# Altium PCB senoko_pvt1.PcbDoc (part 2 of 3)
Units mil, origin at the board's own origin, x right, y up, seen from the top; angles counter-clockwise.
Board outline 4901.58 x 1614.17 mil, 4 copper layers (Top Layer, Internal Plane 1, Internal Plane 2, Bottom Layer), stack 65.8 mil thick; 226 components, 139 nets, 941 pads, 366 vias.
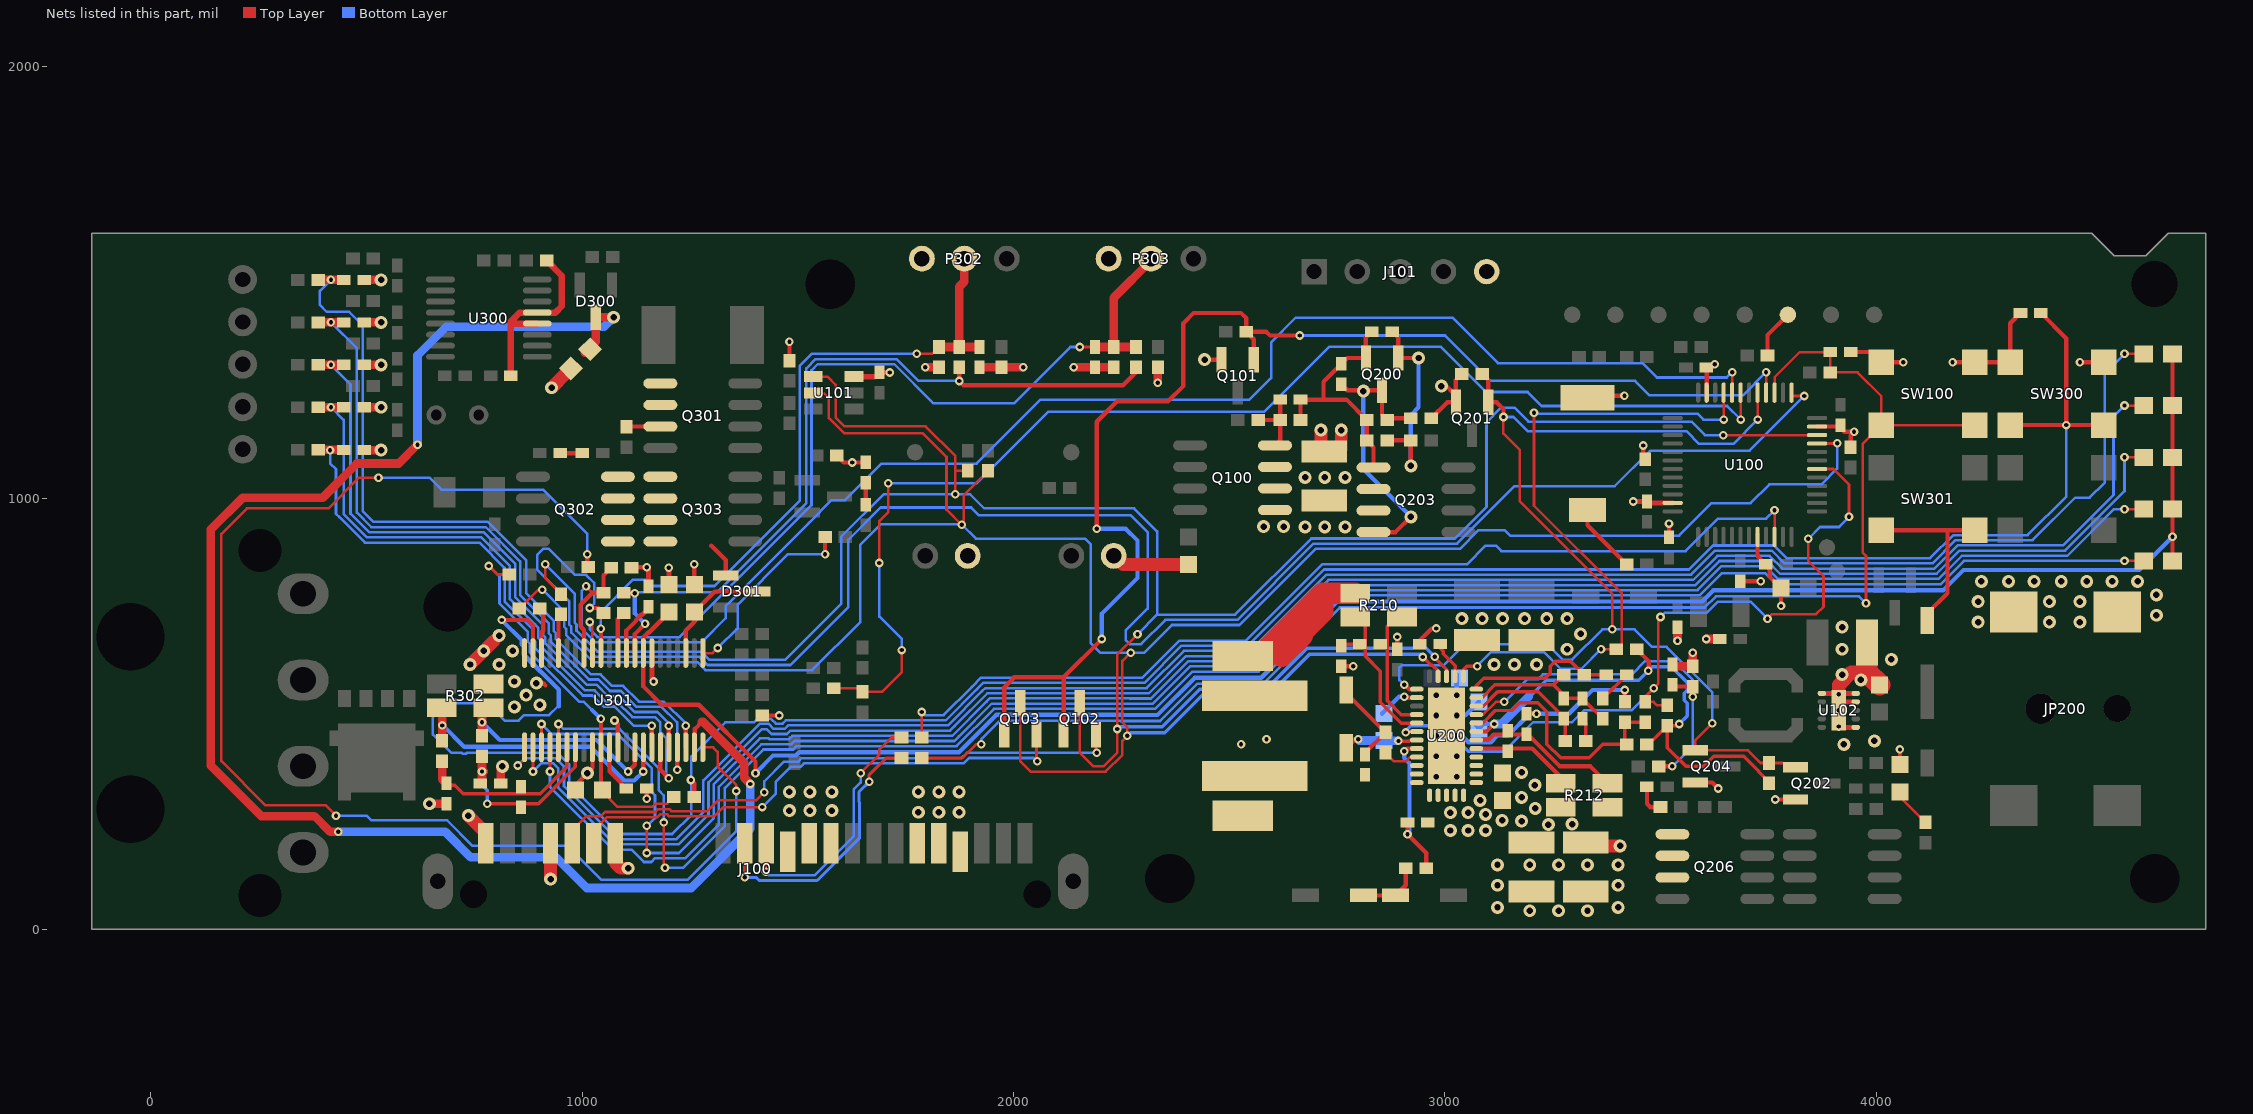
[diagram p4: the nets of this part, all layers, seen from the top]

## Via types
v1: diameter 20, hole 10, Top Layer to Bottom Layer, tented both sides, 200 vias
v2: diameter 30, hole 15, Top Layer to Bottom Layer, tented both sides, 156 vias
v3: diameter 25.98, hole 12.99, Top Layer to Bottom Layer, tented both sides, 10 vias

## Nets (pads, with @x,y where several pads share a name; then routed paths per layer and width w, separated by ;. In a path a pad name is that pad's centre, name@x,y a point inside that pad or via, vN(x,y) a via of type N, cw(c..) or ccw(c..) an arc to the next point about the centre after c; other vN are vias at no path point) (continued)
CHG_ACIN: C217.1 R214.2 R215.1 U200.9 | length 889.5
  Top Layer w6: U200.9@3072.83,498.03 3088.58,498.03 3118.11,527.56 v1(3137.8,527.56)
  Top Layer w10: R214.2@3496.06,377.95 v1(3527.56,377.95) ; C217.1@3531.5,562.99 R215.1@3574.8,562.99 v1(3574.8,539.37)
  Bottom Layer w6: v1(3137.8,527.56) 3189.96,579.72 3215.55,579.72 3227.36,591.54 3434.06,591.54 3464.57,622.05 3530.51,622.05 3574.8,577.76 v1(3574.8,539.37) 3574.8,425.2 v1(3527.56,377.95)
CHG_ACOK: Q201.1 Q202.1 Q204.1 R203.2 R222.2 U100.29 U200.18 | length 2750.5
  Top Layer w6: v1(3135.83,1187.99) 3135.83,1149.61 3173.23,1112.2 3173.23,993.11 3387.8,778.54 v1(3387.8,695.87) ; v1(3620.08,478.35) 3580.71,438.98 Q204.1@3580.71,415.35 3702.76,415.35 3732.28,385.83 3783.46,385.83 3793.31,375.98 Q202.1@3812.99,375.98 ; v1@3725.06,1182.42 U100.29@3725.06,1236.76
  Top Layer w10: v1(2905.51,566.93) 2907.64,566.93 2917.49,557.09 U200.18@2935.04,557.09 ; R203.2@3086.61,1287.4 3100.39,1273.62 Q201.1@3100.39,1222.44 3120.08,1222.44 3135.83,1206.69 v1(3135.83,1187.99)
  Bottom Layer w6: v1(2905.51,566.93) 2894.69,577.76 2894.69,607.28 2899.61,612.2 2997.05,612.2 3046.26,661.42 3237.2,661.42 3273.02,625.61 3294.9,625.61 3365.16,695.87 v1(3387.8,695.87) 3439.67,695.87 3480.32,655.22 3514.31,655.22 3620.08,549.45 v1(3620.08,478.35) ; v1(3135.83,1187.99) 3159.06,1187.99 3192.52,1154.53 3561.02,1154.53 3589.57,1125.98 3669.29,1125.98 v1(3725.39,1182.09)
CHG_ALERT: R326.2 U100.25 | length 4233.4
  Top Layer w6: U100.25@3803.8,1236.76 v1(3833.13,1236.76) v1@3833.66,1236.22
  Top Layer w10: v1(1017.72,745.08) 1037.4,745.08 R326.2@1049.21,733.27
  Bottom Layer w6: v1(1017.72,745.08) 1027.86,755.22 1027.86,803.15 1009.15,821.85 983.27,821.85 922.24,882.87 910.43,882.87 895.37,867.81 895.37,834.94 970.28,760.03 970.28,706.3 974.58,702 974.58,687.79 1030.49,631.89 1271.65,631.89 1290.4,613.14 1482.34,613.14 1617.13,747.92 1617.13,903.43 1691.85,978.16 1901.57,978.16 1919.1,960.63 2271.65,960.63 2311.02,921.26 2311.02,744.09 2259.84,692.91 2259.84,671.26 2269.69,661.42 2295.96,661.42 2352.26,717.71 2518.68,717.71 2695.39,894.42 3028.28,894.42 3161.61,1027.75 3393.89,1027.75 3476.38,1110.24 3706.61,1110.24 v1(3833.13,1236.76)
CHG_BD: C206.1 D202.2 R211.2 | length 206.7
  Top Layer w10: D202.2@2771.65,555.12 2771.65,547.24 R211.2@2862.2,456.69 2814.96,409.45 C206.1@2814.96,405.51
CHG_BOOT: R211.1 U200.26 | length 85.1
  Top Layer w6: R211.1@2862.2,409.45 2881.89,389.76 2909.45,389.76 2919.29,399.61 U200.26@2935.04,399.61
CHG_CE: R220.2 U100.33 U200.13 | length 1556.9
  Top Layer w6: v1(3206.69,1197.83) 3206.69,982.28 3410.43,778.54 3410.43,662.4 R220.2@3397.64,649.61 v1(3362.2,649.61) ; U100.33@3646.32,1236.76 3646.32,1182.42 v1(3646.65,1182.09)
  Top Layer w8: U200.13@3043.31,586.61 3043.31,602.36 3051.18,610.24 v1(3074.8,610.24)
  Bottom Layer w6: v1(3074.8,610.24) 3107.28,642.72 3229.33,642.72 3267.72,604.33 3316.93,604.33 v1(3362.2,649.61) ; v1@3209.65,1195.87 3585.63,1195.87 3599.41,1182.09 v1(3646.65,1182.09)
CHG_CSON: C212.1 R210.4 U200.21 | length 297.9
  Top Layer w8: R210.4@2900.59,724.41 2887.8,724.41 2866.14,702.76 2866.14,530.65 2898.76,498.03 U200.21@2935.04,498.03
CHG_CSOP: C212.2 C218.2 R210.1 U200.22 | length 371.4
  Top Layer w8: C218.2@2759.84,657.48 2763.78,661.42 C212.2@2803.15,661.42 ; R210.1@2792.32,724.41 2814.96,701.77 2814.96,633.86 2850.39,598.43 2850.39,526.6 2898.65,478.35 U200.22@2935.04,478.35
CHG_CSSN: C216.2 R212.4 U200.5 | length 237.9
  Top Layer w10: U200.5@3072.83,419.29 3202.76,419.29 3268.7,353.35 R212.4@3268.7,338.58
CHG_CSSP: C216.1 C219.1 R212.1 U200.6 | length 356.5
  Top Layer w10: U200.6@3072.83,438.98 3100.39,438.98 3113.36,451.95 3192.73,451.95 3266.72,377.95 3337.6,377.95 R212.1@3376.97,338.58
CHG_DCINA: C203.1 R207.2 U200.25 | length 356.3
  Top Layer w10: v1(2905.51,413.39) 2911.42,419.29 U200.25@2935.04,419.29 ; C203.1@2913.39,248.03 v1(2913.39,220.47) 2956.69,177.17 R207.2@2956.69,141.73
  Bottom Layer w10: v1(2905.51,413.39) 2905.51,397.64 2918.13,385.02 2918.13,225.22 v1(2913.39,220.47)
CHG_EAI: C220.2 C221.2 R223.1 R224.1 U200.11 | length 379.4
  Top Layer w8: U200.11@3072.83,537.4 3086.61,537.4 3116.14,566.93 3251.97,566.93 ; C221.2@3275.59,535.43 C221.2@3283.46,535.43 ; R223.1@3275.59,590.55 3251.97,566.93 ; R224.1@3366.14,488.19 C220.2@3318.9,535.43 C221.2@3283.46,535.43 ; 3251.97,566.93 C221.2@3283.46,535.43
CHG_EAO: C221.1 R219.2 U200.10 | length 297.8
  Top Layer w8: U200.10@3072.83,517.72 3088.58,517.72 3122.05,551.18 3216.54,551.18 3279.53,488.19 R219.2@3279.53,437.01
CHG_FBO: C225.2 R223.2 U200.12 | length 355
  Top Layer w8: U200.12@3072.83,557.09 3072.83,564.96 3090.55,582.68 3232.28,582.68 3244.09,594.49 3244.09,610.24 3255.91,622.05 3291.34,622.05 R223.2@3322.83,590.55 C225.2@3374.02,590.55
CHG_ICOUT: R216.2 R218.2 U100.18 U200.23 | length 1839.8
  Top Layer w6: v1(2909.45,456.69) 2911.42,458.66 U200.23@2935.04,458.66 ; v1(3500,724.41) 3494.94,719.35 3494.94,569.75 v1(3484.24,559.05) 3464.57,539.38 R218.2@3464.57,527.56 3484.25,527.56 3492.13,519.69 R216.2@3515.75,519.69 ; v1(3748.03,720.47) 3758.56,731 3860.92,731 3877.95,748.03 3877.95,818.9 3842.52,854.33 v1(3842.52,905.51) ; U100.18@3862.85,1067.47 3901.04,1067.47 3937.01,1031.5 v1(3937.01,956.69)
  Bottom Layer w6: 3137.8,413.39 3204.72,480.32 3295.28,480.32 3322.72,507.76 3432.95,507.76 v1(3484.24,559.05) ; v1(3500,724.41) 3510.01,734.42 3607.41,734.42 3633.08,760.09 3708.42,760.09 v1(3748.03,720.47) ; v1(3842.52,905.51) 3870.08,933.07 3914.37,933.07 v1@3935.04,953.74
  Bottom Layer w8: v1(2909.45,456.69) 2909.45,460.63 2920.63,471.81 2989.84,471.81 3003.31,458.34 3003.31,440.55 3018.04,425.83 3041.34,425.83 3053.78,413.39 3137.8,413.39
CHG_ICREF: R217.2 R218.1 R221.1 U200.8 | length 578.2
  Top Layer w8: U200.8@3072.83,478.35 3087.86,478.35 3117.07,507.56 3154.83,507.56 3173.02,525.75 3215.13,525.75 3236.22,504.65 3236.22,429.67 3268.25,397.64 3334.65,397.64 3366.14,429.13 R217.2@3421.26,429.13 3417.32,433.07 R221.1@3417.32,480.32 R218.1@3464.57,480.32
CHG_IRQ: R115.1 U100.10 | length 2300.2
  Top Layer w6: R115.1@1787.4,444.88 v1(1787.4,503.94) ; U100.10@3764.43,917.86 v1(3764.43,971.79)
  Bottom Layer w6: v1(1787.4,503.94) 1794.4,496.94 1838,496.94 1903.25,562.2 1924.63,583.57 2298.61,583.57 2384.75,669.71 2538.56,669.71 2715.27,846.42 3051.14,846.42 3094.49,889.76 3118.11,889.76 3130.87,877.01 3557.84,877.01 3633.02,952.19 3744.83,952.19 v1(3764.43,971.79)
CHG_IRQ_CN: J100.13 R115.2 | length 600.3
  Top Layer w6: v1(1425.2,133.86) 1425.2,198.43 J100.13@1426.57,199.8 ; v1(1645.67,362.2) 1688.98,405.51 1688.98,417.32 1716.54,444.88 R115.2@1740.16,444.88
  Bottom Layer w6: v1(1425.2,133.86) 1433.07,125.98 1539.37,125.98 1629.92,216.54 1629.92,289.39 1629.42,289.89 1629.42,324.26 1645.67,340.51 v1(1645.67,362.2)
CHG_MASTERPWR: Q101.1 Q102.1 Q103.1 R108.2 U100.28 | length 3122.4
  Top Layer w6: U100.28@3744.75,1236.76 v1(3744.75,1291.99)
  Top Layer w10: Q103.1@1978.35,450.79 1978.35,561.02 2001.97,584.65 2116.14,584.65 ; Q102.1@2116.14,450.79 2116.14,584.65 ; v1(2192.91,929.13) 2192.91,1177.17 2240.16,1224.41 2358.27,1224.41 2393.7,1259.84 2393.7,1405.51 2417.32,1429.13 2527.56,1429.13 2539.37,1417.32 R108.2@2539.37,1385.83 ; v1(2204.72,673.23) 2116.14,584.65 ; Q101.1@2557.09,1320.87 2557.09,1368.11 R108.2@2539.37,1385.83 ; v1(2663.39,1376.97) 2594.49,1376.97 2585.63,1385.83 R108.2@2539.37,1385.83
  Bottom Layer w6: v1(2663.39,1376.97) 3000.87,1376.97 3106.19,1271.65 3440.83,1271.65 3474.3,1238.19 3690.95,1238.19 v1(3744.75,1291.99)
  Bottom Layer w10: v1(2192.91,929.13) 2259.84,929.13 2287.4,901.57 2287.4,814.96 2204.72,732.28 v1(2204.72,673.23)
CHG_PWRSWITCH: C116.2 R119.1 R120.1 SW100.1 SW100.2 U100.27 | length 3461.1
  Top Layer w6: R120.1@1787.4,397.64 1881.89,397.64 1913.39,429.13 v1(1925.2,429.13) ; U100.27@3764.43,1236.76 3764.43,1280.18 3822.83,1338.58 C116.2@3893.7,1338.58 R119.1@3893.7,1291.34 3956.69,1291.34 4011.81,1236.22 SW100.1@4011.81,1169.29 ; v1(3976.38,755.91) 3976.38,866.14 3968.5,874.02 3968.5,1125.98 SW100.1@4011.81,1169.29 ; SW100.2@4228.35,1169.29 SW100.1@4011.81,1169.29
  Bottom Layer w6: v1(1925.2,429.13) 1925.2,440.94 1967.82,483.57 2248.03,483.57 2248.31,483.28 2339.75,483.28 2426.17,569.71 2579.99,569.71 2756.69,746.42 3602.44,746.42 3628.11,772.09 3960.2,772.09 v1(3976.38,755.91)
CHG_PWRSWITCH_CN: J100.14 R120.2 | length 636.4
  Top Layer w7: v1(1376.57,120.67) J100.14@1376.57,199.8 ; v1(1665.35,342.52) 1665.35,358.27 1704.72,397.64 R120.2@1740.16,397.64
  Bottom Layer w7: v1(1376.57,120.67) 1402.95,120.67 1410.14,113.48 1544.55,113.48 1642.42,211.36 1642.42,294.57 1641.92,295.07 1641.92,319.08 v1(1665.35,342.52)
CHG_SCL: Q103.3 R225.2 R329.2 U100.21 U101.5 U200.16 | length 6189.7
  Top Layer w6: R329.2@854.33,744.09 897.64,787.4 v1(907.48,787.4) ; U101.5@1535.43,1244.09 1533.46,1244.09 1532.48,1243.11 1560.04,1243.11 1571.85,1231.3 1571.85,1185.79 1607.05,1150.59 1789.37,1150.59 1844.49,1095.47 1844.49,973.43 v1(1879.92,937.99) 1884.16,942.23 1884.16,1006.2 R225.2@1940.94,1062.99 ; Q103.3@2015.75,525.59 2015.75,389.76 2039.56,365.95 2213.63,365.95 2252.16,404.48 2252.16,437.2 v1(2263.78,448.82) 2263.78,468.51 2252.16,480.13 2252.16,622.24 v1(2271.65,641.73) ; U100.21@3854.98,1126.52 v1@3909.32,1126.52
  Top Layer w8: v1(2948.82,631.64) 2968.09,612.36 2971.16,612.36 2984.25,599.27 U200.16@2984.25,586.61
  Bottom Layer w6: v1(907.48,787.4) 907.48,788.39 958.28,737.58 958.28,701.33 962.58,697.03 962.58,682.82 1025.52,619.89 1266.68,619.89 1285.43,601.14 1533.12,601.14 1644.89,712.91 1644.89,891.93 1691.93,938.98 1879.92,938.98 1912.74,906.16 2165.63,906.16 2179.13,892.65 2179.13,663.39 2200.79,641.73 v1(2271.65,641.73) 2303.15,641.73 2367.13,705.71 2523.65,705.71 2700.36,882.42 3034.74,882.42 3078.08,925.76 3138.45,925.76 3151.21,913.01 3542.93,913.01 3618.11,988.19 3708.66,988.19 3752.46,1031.99 3873.52,1031.99 3909.65,1068.12 v1(3909.65,1126.85)
  Bottom Layer w8: v1(2263.78,448.82) 2271.24,456.28 2350.93,456.28 2437.36,542.71 2591.17,542.71 2686.1,637.64 2942.82,637.64 v1(2948.82,631.64)
CHG_SDA: Q102.3 R226.2 R327.2 U100.22 U101.4 U200.15 | length 6017.2
  Top Layer w6: v1(914.37,846.46) 914.37,813.98 R327.2@950.79,777.56 ; U101.4@1535.43,1281.5 1568.9,1281.5 1587.6,1262.8 1587.6,1187.01 1608.27,1166.34 1796.26,1166.34 1865.16,1097.44 1865.16,1062.99 ; v1(1865.16,1008.86) 1865.16,1062.99 ; R226.2@1893.7,1062.99 1865.16,1062.99 ; Q102.3@2153.54,525.59 2153.54,409.45 2185.04,377.95 2208.66,377.95 2240.16,409.45 v1(2240.16,464.57) 2240.16,637.11 2287.11,684.06 v1(2287.4,684.06) ; v1(3645.67,1145.67) 3646.2,1146.2 3799.75,1146.2 U100.22@3854.98,1146.2
  Top Layer w8: v1(2976.38,632.36) 2976.38,629.92 3003.94,602.36 U200.15@3003.94,586.61
  Bottom Layer w6: v1(914.37,846.46) 982.28,778.54 982.28,711.27 986.58,706.97 986.58,692.76 1035.46,643.89 1276.62,643.89 1295.37,625.14 1470.61,625.14 1600.34,754.87 1600.34,910.38 1698.82,1008.86 v1(1865.16,1008.86) 1899.61,1008.86 1932.09,976.38 2279.53,976.38 2333.06,922.85 2333.06,729.71 ; v1(2287.4,684.06) 2333.06,729.71 ; v1(3645.67,1145.67) 3645.13,1146.2 3602.81,1146.2 3571.85,1177.17 3193.9,1177.17 3161.42,1209.65 3130.61,1209.65 3096.46,1175.49 3096.46,979.57 3023.31,906.42 2690.42,906.42 2513.71,729.71 2333.06,729.71
  Bottom Layer w8: v1(2240.16,464.57) 2245.87,470.28 2345.13,470.28 2431.56,556.71 2585.37,556.71 2680.3,651.64 2957.1,651.64 v1(2976.38,632.36)
CHG_SW: C206.2 L200.1 L200B.1 U200.27 U200.28 U200.29 U200.30 U200.31
CHG_SYS: C100.1 C200.2 C201.1 C202.1 C209.1 C210.1 C211.1 Q100.1 Q100.2 Q100.3 Q200.2 Q203.1 Q203.2 Q203.3 R104.2 R200.1 R204.1 R212.3 U200.2 U200.3 U200.4 | length 649.2
  Top Layer w10: R104.2@2665.35,1181.1 C100.1@2665.35,1228.35 2718.5,1228.35 ; C200.2@2830.71,1385.83 2816.93,1372.05 Q200.2@2816.93,1324.8 2773.62,1324.8 C202.1@2759.84,1311.02 2718.5,1269.69 2718.5,1228.35 ; Q203.1@2834.65,1071.06 2834.65,1118.11 R200.1@2818.9,1133.86 R204.1@2818.9,1181.1 2771.65,1228.35 2718.5,1228.35
  Top Layer w30: C210.1@3326.77,201.77 3334.65,193.9 v2(3406.5,193.9)
  other v2: 3240.16,243.11 3295.28,244.09 3178.15,250.98 3209.65,280.51 3178.15,306.1 3208.66,334.65 3178.15,364.17 2676.18,933.07 2721.46,933.07 2768.7,933.07 2579.72,934.06 2625.98,934.06 2676.18,1048.23 2721.46,1048.23 2768.7,1048.23
CHG_SYS_GATE: C100.2 Q100.4 R104.1 R105.2 | length 162.2
  Top Layer w10: R105.2@2566.93,1181.1 R104.1@2618.11,1181.1 ; Q100.4@2606.3,1122.24 2618.11,1134.06 R104.1@2618.11,1181.1 ; C100.2@2618.11,1228.35 R104.1@2618.11,1181.1
CHG_VDDP: C215.1 D202.1 U200.24 | length 174.1
  Top Layer w8: v1@2892.36,436.69 2917.73,436.69 2920.02,438.98 U200.24@2935.04,438.98
  Top Layer w10: D202.1@2771.65,421.26 2791.34,440.94 v1(2799.21,440.94)
  Bottom Layer w20: v1(2799.21,440.94) 2802.17,437.99 C215.1@2859.25,437.99 2860.24,437.01 v1(2892.36,437.01)
CHG_VICM: C224.1 U200.14 | length 92.7
  Top Layer w8: C224.1@2980.31,661.42 2996.38,645.35 2996.38,638.76 3023.62,611.51 U200.14@3023.62,586.61
CHG_VREF: C214.1 R216.1 R217.1 R220.1 R222.1 U200.7 | length 1218.1
  Top Layer w8: R217.1@3468.5,429.13 3472.44,429.13 R216.1@3515.75,472.44 ; v1(3543.31,476.38) 3539.37,472.44 R216.1@3515.75,472.44 ; R222.1@3755.54,338.58 3728.19,365.94 3728.19,366.3 3692.91,401.57 3623.65,401.57 3600.03,377.95 3559.06,377.95 3515.75,421.26 R216.1@3515.75,472.44
  Top Layer w10: U200.7@3072.83,458.66 3096.46,458.66 v1(3114.17,476.38) ; R220.1@3444.88,649.61 3472.44,622.05 v1@3472.44,599.41
  Bottom Layer w8: C214.1@3071.5,471.81 C214.1@3078.74,464.57 ; 3201.4,543.86 3235.29,577.76 3449.8,577.76 v1(3471.46,599.41) 3481.09,609.05 3525.13,609.05 3561.8,572.37 3561.8,554.65 3554.8,547.65 3554.8,531.09 3561.8,524.09 3561.8,494.87 v1(3543.31,476.38)
  Bottom Layer w10: C214.1@3078.74,464.57 3090.55,476.38 v1(3114.17,476.38)
  Bottom Layer w20: v1(3114.17,476.38) 3130.91,476.38 3193.9,539.37
GG_2.5V: C321.1 R334.2 R338.1 U301.32 | length 883.6
  Top Layer w6: v1(783.46,842.52) 803.15,822.83 R338.1@830.71,822.83 ; C321.1@1043.31,322.83 1081.99,284.15 1162.1,284.15 1169.29,291.34 1196.85,291.34 R334.2@1212.6,307.09
  Top Layer w10: C321.1@1043.31,322.83 U301.32@1043.31,422.24 v1(1043.31,488.19)
  Bottom Layer w6: v1(783.46,842.52) 808.2,817.78 808.2,755.58 873.87,689.91 873.87,666.95 878.58,662.24 878.58,642.55 993.58,527.56 1003.94,527.56 1022.64,508.86
  Bottom Layer w10: 1022.64,508.86 v1(1043.31,488.19)
GG_3.3V: C323.1 D302.1 D303.1 D304.1 D305.1 D306.1 U301.8 | length 4551
  Top Layer w10: C323.1@1200.79,736.22 1200.79,734.08 1154.37,687.66 1152.23,687.66 1141.73,677.17 U301.8@1141.73,640.75 1141.73,562.99 1184.06,520.67 1270.32,520.67 1401.57,389.42 v1(1401.57,362.2) ; D302.1@4687.01,854.33 D303.1@4687.01,974.41 D304.1@4687.01,1094.49 D305.1@4687.01,1214.57 D306.1@4687.01,1334.65
  Bottom Layer w10: v1(1401.57,362.2) 1442.43,403.06 1495.21,403.06 1503.09,410.94 1873.62,410.94 1960.25,497.57 2253.83,497.57 2254.11,497.28 2333.95,497.28 2420.37,583.71 2574.19,583.71 2750.9,760.42 3596.64,760.42 3622.31,786.09 4155.26,786.09 4202.51,833.33 4609.91,833.33 v1(4687.01,910.43)
GG_ALERT: R326.1 U301.11 | length 98.2
  Top Layer w10: U301.11@1082.68,640.75 1082.68,719.49 R326.1@1096.46,733.27
GG_ASRN: R302.4 R325.2 U301.36 | length 515.5
  Top Layer w10: v1(1106.3,366.14) 1122.05,381.89 U301.36@1122.05,422.24
  Top Layer w20: R302.4@762.8,513.78 767.72,508.86 R325.2@767.72,448.82
  Bottom Layer w10: v1(767.72,480.32) 808.89,439.14 1033.3,439.14 v1(1106.3,366.14)
GG_ASRP: R302.1 R328.2 U301.37 | length 662.6
  Top Layer w10: v1(1141.73,366.14) U301.37@1141.73,422.24
  Top Layer w20: R302.1@670.28,513.78 675.2,508.86 v1(675.2,472.93) R328.2@675.2,437.01
  Bottom Layer w10: v1@675.94,473.67 726.46,423.14 1019.6,423.14 1097.6,345.14 1120.73,345.14 v1(1141.73,366.14)
GG_BAT: C303.1 D300.3 U301.43 | length 3727.8
  Top Layer w10: U301.43@1259.84,422.24 1261.16,423.56 1261.16,464.9 1277.56,481.3
  Top Layer w20: v1(434.06,226.38) 415.35,226.38 378.94,262.8 255.91,262.8 138.78,379.92 138.78,927.17 212.6,1000.98 398.62,1000.98 477.86,1080.22 574.32,1080.22 v1(618.11,1124.02) ; C303.1@1006.52,1337.23 1031.5,1362.2 D300.3@1031.5,1419.29 v2(1072.83,1419.29) ; 1277.56,481.3 1279.99,481.3 1375.57,385.72 1375.57,351.43 v1(1389.76,337.24)
  Bottom Layer w20: v1(434.06,226.38) 682.09,226.38 741.14,167.32 938.98,167.32 1010.34,95.96 1252.45,95.96 1389.76,233.27 v1(1389.76,337.24) ; v1(618.11,1124.02) 618.11,1330.71 685.04,1397.64 1051.18,1397.64 v2(1072.83,1419.29)
GG_CHG: R307.2 U301.44 | length 3155.8
  Top Layer w6: v1(429.13,263.78) 405.51,287.4 266.1,287.4 163.39,390.11 163.39,916.97 222.79,976.38 411.42,976.38 482.28,1047.24 v1(527.56,1047.24) ; U301.44@1279.53,422.24 1303.15,422.24 1313.98,411.42 1313.98,377.95 1357.28,334.65 v1(1357.28,320.87)
  Top Layer w10: v1(1011.81,870.08) 1011.81,842.52 R307.2@1013.78,840.55
  Bottom Layer w6: v1(429.13,263.78) 500,263.78 510.83,252.95 687.01,252.95 746.06,193.9 965.55,193.9 1044.49,114.96 1244.58,114.96 1357.28,227.66 v1(1357.28,320.87) ; v1(527.56,1047.24) 645.67,1047.24 673.23,1019.69 909.45,1019.69 1011.81,917.32 v1(1011.81,870.08)
GG_DISP: C326.1 R334.1 SW300.3 SW300.4 U301.21 | length 5830.8
  Top Layer w10: v1(813.03,717.55) 873,717.55 885.83,704.72 U301.21@885.83,640.75 ; v1(1251.97,346.46) 1259.84,338.58 R334.1@1259.84,307.09 ; SW300.4@4311.02,1169.29 v1(4440.94,1169.29) ; C326.1@4381.89,1429.13 4440.94,1370.08 v1(4440.94,1169.29) ; SW300.3@4527.56,1169.29 v1(4440.94,1169.29)
  Bottom Layer w6: 944.39,518.21 922.85,496.67 865.16,496.67 852.74,484.25 819.88,484.25 779.53,524.61 686.02,524.61 653.54,492.13 653.54,451.97 696.37,409.14 720.67,409.14 722.74,407.07 730.19,407.07 732.26,409.14 943.01,409.14 969.78,382.37 969.78,337.04 1085.66,221.16 1208.36,221.16 1252.95,265.75 1252.95,401.39 1331.88,480.32 1398.38,480.32 1406.45,488.38 1437.51,488.38 1448.82,477.06 1464.56,477.06 1472.44,484.94 1842.97,484.94 1915.25,557.22 1929.6,571.57 2303.58,571.57 2389.72,657.71 2543.54,657.71 2720.24,834.42 3565.99,834.42 3621.71,890.14 3762.89,890.14 3792.42,860.61 4125.14,860.61 4178.86,914.33 4351.34,914.33 4440.94,1003.94 v1(4440.94,1169.29)
  Bottom Layer w10: v1(813.03,717.55) 859.87,670.72 859.87,661.16 864.58,656.44 864.58,636.75 945.87,555.47 945.87,516.73
GG_DSG: R308.2 U301.1 | length 449.5
  Top Layer w6: U301.1@1279.53,640.75 1302.17,640.75 v1(1313.98,652.56)
  Top Layer w10: v1(1562.99,870.08) R308.2@1562.99,909.45
  Bottom Layer w6: v1(1313.98,652.56) 1360.73,699.31 1360.73,753.44 1477.36,870.08 v1(1562.99,870.08)
GG_GSRN: C317.1 C318.1 R325.1 U301.29 | length 435.3
  Top Layer w8: v1(779.53,291.34) 898.48,291.34 984.25,377.11 U301.29@984.25,422.24
  Top Layer w20: C318.1@763.78,338.58 767.72,342.52 v1(767.72,366.14) 771.65,366.14 767.72,370.08 R325.1@767.72,401.57
  Bottom Layer w8: v1(767.72,366.14) 767.72,334.65 779.53,322.83 v1(779.53,291.34)
GG_GSRP: C317.2 C319.1 R328.1 U301.28 | length 415.4
  Top Layer w8: C319.1@688.98,334.65 704.72,334.65 724.41,314.96 902.3,314.96 964.57,377.23 U301.28@964.57,422.24
  Top Layer w20: R328.1@675.2,389.76 675.2,348.43 C319.1@688.98,334.65
GG_P1: C312.1 R313.2 U301.42 | length 1744.8
  Top Layer w10: U301.42@1240.16,422.24 v1(1240.16,472.44)
  Top Layer w20: R313.2@387.8,1505.91 v1(417.32,1505.91) C312.1@438.98,1505.91
  Bottom Layer w6: v1(417.32,1505.91) 391.73,1480.32 391.73,1447.83 407.48,1432.09 459.65,1432.09 491.14,1400.59 491.14,969.49 515.75,944.88 781.23,944.88 869.89,856.22 869.89,779.72 933.87,715.74 933.87,691.81 938.58,687.09 938.58,672.88 1020.12,591.35 1042.48,591.35 1069.09,564.73 1094.69,564.73 1131.29,528.13 1188.94,528.13 1240.16,476.91 v1(1240.16,472.44)
GG_P2: C315.1 R314.2 U301.41 | length 1690.8
  Top Layer w10: v1(1220.47,370.08) U301.41@1220.47,422.24
  Top Layer w20: R314.2@387.8,1407.48 v1(417.32,1407.48) C315.1@438.98,1407.48
  Bottom Layer w6: v1(417.32,1407.48) 477.36,1347.44 477.36,966.3 510.78,932.88 776.26,932.88 856.2,852.94 856.2,775.69 921.87,710.02 921.87,686.84 926.58,682.12 926.58,667.91 1015.15,579.35 1037.51,579.35 1064.12,552.73 1089.71,552.73 1126.32,516.13 1183.97,516.13 1219.79,480.31 1220.47,479.63 v1(1220.47,370.08)
GG_P3: C313.1 R315.2 U301.40 | length 1477.1
  Top Layer w10: U301.40@1200.79,422.24 v1(1200.79,472.44)
  Top Layer w20: R315.2@387.8,1309.06 v1(417.32,1309.06) C313.1@438.98,1309.06
  Bottom Layer w6: v1(417.32,1309.06) 462.6,1263.78 462.6,964.09 505.81,920.88 771.29,920.88 844.2,847.97 844.2,770.49 909.87,704.82 909.87,681.87 914.58,677.15 914.58,662.94 1010.18,567.35 1032.54,567.35 1059.15,540.73 1084.74,540.73 1121.35,504.13 1174.26,504.13 1200.79,477.6 v1(1200.79,472.44)
GG_P4: C316.1 R316.2 U301.39 | length 1530.5
  Top Layer w10: U301.39@1181.1,422.24 1181.1,370.08 v1(1200.79,350.39)
  Top Layer w20: R316.2@387.8,1210.63 v1(417.32,1210.63) C316.1@438.98,1210.63
  Bottom Layer w6: v1(417.32,1210.63) 446.85,1181.1 446.85,962.87 500.84,908.88 766.31,908.88 832.2,843 832.2,765.52 890.84,706.88 897.87,699.85 897.87,676.9 902.58,672.18 902.58,657.97 1006.29,554.26 1028.65,554.26 1054.18,528.73 1079.77,528.73 1116.38,492.13 1169.29,492.13 1169.29,491.44 1181.1,479.63 1181.1,457.68 1194.73,444.05 1194.73,356.44 v1(1200.79,350.39)
GG_P5: C314.1 R317.2 U301.38 | length 1257.6
  Top Layer w10: U301.38@1161.42,422.24 v1(1161.42,472.44)
  Top Layer w20: R317.2@387.8,1112.2 C314.1@438.98,1112.2
  Bottom Layer w6: v1(415.35,1111.22) 415.35,1080.71 429.13,1066.93 429.13,963.61 437.01,955.74 495.87,896.88 761.34,896.88 820.2,838.03 820.2,760.55 885.87,694.88 885.87,671.92 890.58,667.21 890.58,653 1001.32,542.26 1023.68,542.26 1049.21,516.73 1074.8,516.73 1119.09,472.44 v1(1161.42,472.44)
GG_SMBC: R329.1 U301.20 | length 108.2
  Top Layer w10: R329.1@901.57,744.09 909.45,736.22 909.45,692.91 905.51,688.98 U301.20@905.51,640.75
GG_SMBD: R327.1 U301.18 | length 95.5
  Top Layer w10: U301.18@944.88,640.75 R327.1@944.88,736.22
GG_SYSPRES: R324.2 R330.1 U100.32 U301.15 | length 3544.4
  Top Layer w6: v1(1008.86,795.28) 1008.86,795.1 1023.45,780.51 ; U100.32@3666.01,1236.76 v1(3666.01,1291.99) v1@3666.34,1292.32
  Top Layer w10: U301.15@1003.94,640.75 1003.94,694.88 995.78,703.04 995.78,752.84 1023.45,780.51 R324.2@1049.21,780.51 1049.21,820.87 R330.1@1066.93,838.58
  Bottom Layer w6: v1(1008.86,795.28) 998.58,785 998.58,711.94 998.58,697.73 1030.96,665.35 1276.57,665.35 1332.68,721.46 1332.68,749.55 1343.24,760.11 1525.42,942.29 1578.2,995.08 1609.49,995.08 1694.32,1079.91 1914.56,1079.91 2062.8,1228.16 2546.92,1228.16 2597.25,1278.49 2597.25,1361.27 2654.29,1418.31 3018,1418.31 3123.31,1312.99 3457.96,1312.99 3491.42,1279.53 3653.54,1279.53 v1(3666.01,1291.99)
GG_TOUT: R324.1 R331.2 R332.2 U301.9 | length 1830.9
  Top Layer w10: R324.1@1096.46,780.51 v1@1122.05,780.51 ; U301.9@1122.05,640.75 1122.05,685.04 v1(1145.67,708.66) ; R331.2@1874.02,1303.15 v1(1874.02,1271.65) 1883.86,1261.81 2253.94,1261.81 2283.46,1291.34 R332.2@2283.46,1303.15
  Bottom Layer w6: v1@1124.02,781.5 1312.22,781.5 1519.5,988.77 1519.5,1300.99 1540.84,1322.34 1728.55,1322.34 1779.23,1271.65 v1(1874.02,1271.65)
  Bottom Layer w10: v1(1122.05,779.53) 1122.05,732.28 v1(1145.67,708.66)
GG_TS1: C325.1 P302.2 R331.1 R335.2 U301.13 | length 1632.6
  Top Layer w6: v1(1775.59,1334.34) 1810.72,1334.34 R335.2@1826.77,1350.39
  Top Layer w10: U301.13@1043.31,640.75 v1(1043.31,696.85)
  Top Layer w20: R335.2@1826.77,1350.39 R331.1@1874.02,1350.39 ; P302.2@1885.83,1555.12 1885.83,1501.57 1874.02,1489.76 R331.1@1874.02,1350.39 ; C325.1@1921.26,1350.39 R331.1@1874.02,1350.39
  Bottom Layer w6: v1(1043.31,696.85) 1043.31,736.22 1118.11,811.02 1145.67,811.02 1160.43,796.26 1171.26,796.26 1306.1,796.26 1504.73,994.89 1504.73,1307.11 1531.96,1334.34 v1(1775.59,1334.34)
GG_TS2: C324.1 P303.2 R332.1 R333.2 U301.14 | length 2141
  Top Layer w6: v1(1017.58,712.74) 1023.62,706.7 U301.14@1023.62,640.75 ; v1(2153.54,1350.39) C324.1@2188.98,1350.39
  Top Layer w20: C324.1@2188.98,1350.39 R332.1@2283.46,1350.39 ; R333.2@2232.28,1350.39 2232.28,1464.57 P303.2@2320.87,1553.15
  Bottom Layer w6: v1(1017.58,712.74) 1017.58,695.7 1035.44,677.85 1225.54,677.85 1325.52,777.83 1531.5,983.8 1531.5,1296.02 1545.81,1310.34 1723.58,1310.34 1814.43,1219.49 2000.98,1219.49 2131.89,1350.39 v1(2153.54,1350.39)
GG_VCC: C307.1 D301.3 U301.3 | length 270.8
  Top Layer w10: U301.3@1240.16,640.75 1240.16,692.91 1259.84,712.6 C307.1@1259.84,736.22 1307.09,783.46 D301.3@1407.48,783.46
GND: C101.2 C102.2 C103.2 C104.2 C108.2 C109.2 C110.2 C111.2 C112.1 C113.1 C114.2 C115.2 C116.1 C117.2 C118.2 C201.2 C203.2 C207.2 C208.2 C209.2 C210.2 C211.2 C213.2 C214.2 C215.2 C217.2 C218.1 C219.2 C222.2 C223.1 C224.2 C303.2 C305.1 C307.2 C312.2 C313.2 C314.2 C315.2 C316.2 C318.2 C319.2 C320.2 C321.2 C322.2 C323.2 C324.2 C325.2 C326.2 J100.4 J100.5 J100.6 J100.10 J100.11 J100.12 J100.16 J100.19 J100.22 J101.5 JP200.2 JP200.3 P101.2 P102.2 P302.1 P303.1 Q101.2 Q201.2 Q202.2 Q204.2 R106.1 R114.1 R116.1 R118.2 R202.2 R203.1 R215.2 R221.2 R302.3 R311.2 R323.2 R330.2 R333.1 R335.1 R336.1 R337.1 SW100.3 SW100.4 SW300.1 SW300.2 TP107.1 U100.8 U100.23 U100.35 U100.47 U101.3 U102.1 U102.4 U102.5 U102.6 U102.11 U200.1 U200.19 U200.32 U200.33 U200.34 U200.35 U301.7 U301.22 U301.31 U301.34 | length 4981.3
  Top Layer w10: v2(893.7,570.87) 909.45,570.87 914.7,565.61 ; C321.2@984.25,318.9 C321.2@984.25,322.83 984.25,334.65 v2(1011.81,362.2) 1023.62,374.02 U301.31@1023.62,422.24 ; v1(1074.8,484.25) 1082.68,476.38 U301.34@1082.68,422.24 ; R330.2@1114.17,839.57 v1(1149.61,839.57) ; v1(1149.61,303.15) C322.2@1149.61,326.77 ; C307.2@1259.84,799.21 v1(1259.84,846.46) ; R323.2@1417.32,496.06 v1(1456.69,496.06) ; R118.2@1480.31,1318.9 v1(1480.31,1362.2) ; R311.2@1590.55,1098.43 1606.3,1082.68 C305.1@1657.48,1082.68 ; v2@2440.94,1322.83 v2(2442.91,1320.87) Q101.2@2482.28,1320.87 ; C218.1@2759.84,610.24 v1(2787.4,610.24) ; C223.1@2889.76,649.61 v1(2889.76,678.15) ; v1(2905.51,539.37) 2907.47,537.4 U200.19@2935.04,537.4 ; C224.2@2933.07,661.42 2969.49,697.83 v1(2980.32,697.83) ; R202.2@2968.5,1185.04 3005.91,1222.44 Q201.2@3025.59,1222.44 ; v2(2992.13,1259.84) 3003.94,1259.84 3019.69,1244.09 3019.69,1228.35 Q201.2@3025.59,1222.44 ; R203.1@3039.37,1287.4 3025.59,1273.62 Q201.2@3025.59,1222.44 ; C219.2@3188.98,500 v1(3212.59,500) ; C108.2@3330.71,1232.28 3335.63,1237.2 v1(3416.34,1237.2) ; R221.2@3417.32,527.56 v1(3417.32,555.12) ; v1(3459.65,1122.05) 3459.65,1095.47 R106.1@3464.57,1090.55 ; C109.2@3519.69,909.45 v1(3519.69,940.94) ; Q204.2@3580.71,340.55 3620.08,340.55 v1(3633.86,326.77) ; U100.35@3606.95,1236.76 3606.95,1294.62 3601.56,1300.02 3615.96,1300.02 v1(3625.98,1310.04) ; C114.2@3685.04,807.09 v1(3732.28,807.09) ; U100.8@3725.06,917.86 3725.06,865.49 C112.1@3744.09,846.46 3752.95,837.6 3752.95,817.91 C113.1@3779.53,791.34 v1(3779.53,750) ; R114.1@3748.03,1330.71 3748.03,1377.95 TP107.1@3795.28,1425.2 ; v1(3765.75,301.18) Q202.2@3812.99,301.18 ; U100.23@3862.85,1165.89 C104.2@3913.92,1165.89 ; C104.2@3917.32,1169.29 C104.2@3913.92,1165.89 ; R116.1@3940.95,1118.11 3940.95,1145.67 v1(3948.82,1153.54) 3926.27,1153.54 C104.2@3913.92,1165.89 ; C116.1@3940.94,1338.58 3988.19,1338.58 SW100.3@4011.81,1314.96 v1(4062.99,1314.96) ; C213.2@4055.12,381.89 v1(4055.12,417.32) ; v1(4177.17,1314.96) SW100.4@4228.35,1314.96 SW300.2@4311.02,1314.96 4311.02,1405.51 C326.2@4334.65,1429.13 ; v1(4472.44,1314.96) SW300.1@4527.56,1314.96 SW300.1@4515.75,1326.77
  Top Layer w12: v1(1149.61,839.57) 1153.54,835.63 C320.2@1153.54,795.28 ; U301.7@1161.42,640.75 1161.42,578.74 v1(1165.35,574.8) ; C323.2@1200.79,799.21 v1(1200.79,838.58) ; U101.3@1629.92,1281.5 1679.13,1281.5 C115.2@1688.98,1291.34 v1(1712.6,1291.34) ; v1(3437.01,992.13) C102.2@3468.5,992.13 3471.9,988.73 U100.47@3528.21,988.73 ; U102.6@3874.02,547.24 3913.39,547.24 U102.5@3952.76,547.24 ; U102.11@3909.45,527.56 3913.39,527.56 U102.4@3952.76,527.56 ; U102.11@3913.39,468.5 U102.1@3952.76,468.5
  Top Layer w20: C314.2@494.09,1111.22 v2(533.46,1111.22) ; C316.2@494.09,1210.63 v2(533.46,1210.63) ; C313.2@494.09,1309.06 v2(533.46,1309.06) ; C315.2@494.09,1407.48 v2(533.46,1407.48) ; C312.2@494.09,1505.91 v2(533.46,1505.91) ; v2(645.67,291.34) C319.2@685.04,291.34 ; C318.2@811.02,338.58 811.02,374.02 v2(814.96,377.95) ; v1(1795.28,1303.15) R335.1@1826.77,1303.15 ; C325.2@1921.26,1303.15 R336.1@1972.44,1303.15 v1(2022.64,1303.15) ; v1(2139.76,1303.15) C324.2@2188.98,1303.15 R333.1@2232.28,1303.15 ; v1(2334.65,1267.72) R337.1@2334.65,1303.15 ; C217.2@3531.5,610.24 R215.2@3574.8,610.24 v1(3574.8,641.73) ; v1(3539.37,669.29) C110.2@3539.37,700.79 ; v1(3606.3,673.23) C111.2@3637.8,673.23
  Top Layer w30: v2(736.22,263.78) 776.57,223.43 J100.22@776.57,199.8 ; v2(740.16,614.17) v2(771.65,645.67) 795.28,669.29 ; v2(926.57,116.73) J100.19@926.57,199.8 ; v2(929.13,1255.91) 961.98,1288.75 C303.2@961.98,1292.69 ; J100.16@1076.57,199.8 1076.57,154.76 1089.61,141.73 v2(1106.3,141.73) ; P102.2@2233.86,866.14 2253.54,846.46 C101.2@2405.51,846.46 ; v2(2712.6,1157.48) 2712.6,1116.14 C201.2@2720.47,1108.27 2753.94,1108.27 2759.84,1114.17 v2(2759.84,1157.48)
  Top Layer w32: v1(3913.39,507.88) 3913.39,527.56 v1(3913.39,545.28) 3913.39,547.24 3913.39,566.93 3942.91,596.46 3978.35,596.46
  Top Layer w50: C118.2@3978.35,665.35 3978.35,596.46 C117.2@4007.87,566.93
  Bottom Layer w10: C215.2@2854.33,500 2893.7,539.37 v1(2905.51,539.37) ; v3(3027.56,448.82) 3039.56,448.82 3054.5,433.88 3106.32,433.88 3122.24,449.8 3146.65,449.8 3196.85,500 v1(3212.59,500) 3287.4,500 3342.52,555.12 v1(3417.32,555.12) ; v3(3027.56,496.06) 3047.24,496.06 C214.2@3078.74,527.56 ; v3(3027.56,543.31) C222.2@3027.56,590.55
  other v1: 2527.56,429.13 2586.61,440.94 3913.39,470.47 1625.98,1082.68
  other v2: 3196.85,43.31 3263.78,43.31 3330.71,43.31 3122.05,51.18 3401.57,51.18 3122.05,102.36 3401.57,102.36 3122.05,149.61 3196.85,149.61 3263.78,149.61 3330.71,149.61 3401.57,149.61 3012.8,229.33 3054.13,229.33 3094.49,229.33 3132.87,252.95 3094.49,266.73 3012.8,270.67 3054.13,270.67 1779.53,271.65 1826.77,271.65 1874.02,271.65 1480.32,275.59 1527.56,275.59 1578.74,275.59 3081.69,299.21 1480.32,318.9 1527.56,318.9 1578.74,318.9 1779.53,318.9 1826.77,318.9 1874.02,318.9 3925.2,429.13 3996.06,437.01 842.52,515.75 901.57,520.67 870.08,543.31 842.52,574.8 3964.57,578.74 3921.26,590.55 807.09,614.17 3114.17,614.17 3161.42,614.17 3212.6,614.17 4035.43,625.98 838.58,645.67 3283.46,649.61 3921.26,649.61 807.09,681.1 3314.96,685.04 3921.26,700.79 4236.22,712.6 4401.57,712.6 4472.44,712.6 3039.37,720.47 3086.61,720.47 3133.85,720.47 3185.04,720.47 3236.22,720.47 3283.46,720.47 4649.61,728.35 4236.22,759.84 4401.57,759.84 4472.44,759.84 4649.61,775.59 4244.09,807.09 4307.09,807.09 4366.14,807.09 4429.13,807.09 4488.19,807.09 4547.24,807.09 4606.3,807.09
  other v3: 2980.31,354.33 3027.56,354.33 2980.31,401.57 3027.56,401.57 2980.32,448.82 2980.31,496.06 2980.31,543.31
HOST_SMB_SCL: J100.17 Q103.2 | length 1211.7
  Top Layer w6: J100.17@1026.57,199.8 1026.57,228.78 1057.94,260.15 1174.22,260.15 1181.11,267.03 1196.85,267.03 1201.57,262.31 1305.61,262.31 1326.96,283.65 v1(1417.51,283.65) ; v1@2053.15,389.76 Q103.2@2053.15,450.79
  Bottom Layer w6: v1(1417.51,283.65) 1448.82,314.96 1448.82,342.52 1483.36,377.06 1505.98,377.06 1513.86,384.94 1884.39,384.94 1896.9,397.45 2047.43,397.45 v1(2055.12,389.76)
HOST_SMB_SDA: J100.18 Q102.2 | length 1381.4
  Top Layer w6: J100.18@976.57,199.8 976.57,229.53 1009.84,262.8 1043.62,262.8 1052.97,272.15 1169.25,272.15 1176.14,279.03 1201.82,279.03 1206.54,274.31 1290.06,274.31 1314.96,299.21 1403.07,299.21 v1(1422.01,318.15) ; Q102.2@2190.94,450.79 2190.94,411.42 v1(2192.91,409.45)
  Bottom Layer w6: v1(1422.01,318.15) 1422.01,343.27 1467.8,389.06 1501.01,389.06 1508.89,396.94 1879.42,396.94 1891.93,409.45 v1(2192.91,409.45)
HOST_TO_PM_UART: R101.1 R109.1 U100.31 | length 2881
  Top Layer w6: R101.1@1582.68,559.06 1641.73,559.06 R109.1@1649.61,551.18 1695.87,551.18 1741.14,596.46 v1(1741.14,647.64) ; v1(1688.98,849.41) 1688.98,946.85 1709.65,967.52 v1(1709.65,1034.45) ; v1@3685.69,1182.42 U100.31@3685.69,1236.76
  Bottom Layer w6: v1(1688.98,849.41) 1688.98,725.39 1741.14,673.23 v1(1741.14,647.64) ; v1(1709.65,1034.45) 1709.94,1034.15 1914.19,1034.15 2080.64,1200.6 2581.5,1200.6 2732.28,1351.38 2990.27,1351.38 3095.59,1246.06 3191.93,1246.06 3224.41,1213.58 3654.53,1213.58 v1(3686.02,1182.09)
LED1: D306.2 U301.23 | length 4622.9
  Top Layer w6: v1(850.39,379.92) 866.14,395.67 U301.23@866.14,422.24 ; v1@4574.8,1335.63 v1(4575.79,1334.65) D306.2@4620.08,1334.65
  Bottom Layer w6: v1(850.39,379.92) 867.61,397.14 938.04,397.14 957.68,377.5 957.68,332.17 1080.69,209.16 1218.02,209.16 1280.74,271.88 1280.74,345.7 1411.42,476.38 1432.54,476.38 1443.85,465.06 1469.53,465.06 1477.41,472.94 1847.94,472.94 1927.25,552.25 1934.57,559.57 2308.55,559.57 2394.69,645.71 2548.51,645.71 2725.21,822.42 3570.96,822.42 3626.68,878.14 3757.92,878.14 3787.45,848.61 4130.11,848.61 4183.83,902.33 4362.96,902.33 4461.61,1000.98 4495.08,1000.98 4529.53,1035.43 4529.53,1288.39 v1(4575.79,1334.65)
LED2: D305.2 U301.24 | length 4507.5
  Top Layer w6: v1(885.83,366.14) U301.24@885.83,422.24 ; v1(4575.79,1214.57) D305.2@4620.08,1214.57
  Bottom Layer w6: v1(885.83,366.14) 904.83,385.14 933.07,385.14 944.2,374.01 944.2,328.68 1075.72,197.16 1222.99,197.16 1292.74,266.91 1292.74,340.73 1416.39,464.38 1427.57,464.38 1438.88,453.06 1474.5,453.06 1482.38,460.94 1852.91,460.94 1863.38,471.41 1939.54,547.57 2313.52,547.57 2399.66,633.71 2553.48,633.71 2730.19,810.42 3575.93,810.42 3631.65,866.14 3752.95,866.14 3782.48,836.61 4135.08,836.61 4188.8,890.33 4433.16,890.33 4550.2,1007.37 4550.2,1188.98 v1(4575.79,1214.57)
LED3: D304.2 U301.25 | length 4529.8
  Top Layer w6: U301.25@905.51,422.24 v1(905.51,476.38) ; v1@1149.6,176.24 v1(1149.6,240.16) ; v1(4575.79,1094.49) D304.2@4620.08,1094.49
  Bottom Layer w6: v1(905.51,476.38) 928.75,453.14 1081.6,453.14 1161.42,373.33 1161.42,318.21 1168.61,311.02 1168.61,258.17 1150.59,240.16 v1(1149.6,240.16) ; v1(1149.6,177.16) 1224.41,177.16 1304.74,257.5 1304.74,335.76 1412.02,443.04 1431.93,443.04 1433.91,441.06 1479.47,441.06 1487.35,448.94 1857.88,448.94 1937.2,528.25 1944.51,535.57 2269.57,535.57 2269.85,535.28 2318.21,535.28 2404.63,621.71 2558.45,621.71 2725.3,788.56 2735.16,798.42 3580.9,798.42 3636.62,854.14 3646.56,854.14 3747.98,854.14 3777.51,824.61 4140.05,824.61 4193.77,878.33 4438.13,878.33 4575.79,1015.99 v1(4575.79,1094.49)
LED4: D303.2 U301.26 | length 4273.6
  Top Layer w6: v1(925.19,366.14) U301.26@925.2,422.24 ; v1(4575.79,974.41) D303.2@4620.08,974.41
  Bottom Layer w6: v1(925.19,366.14) 925.19,330.71 1070.87,185.04 1114.17,185.04 1143.01,156.21 1160.14,156.21 1169.1,165.16 1229.38,165.16 1229.57,165.35 1238.85,165.35 1316.74,243.24 1316.74,330.79 1415.01,429.06 1484.44,429.06 1492.32,436.94 1862.85,436.94 1873.32,447.41 1949.48,523.57 2264.6,523.57 2264.88,523.28 2323.18,523.28 2409.6,609.71 2563.42,609.71 2740.13,786.42 3585.87,786.42 3641.59,842.14 3743.01,842.14 3772.54,812.61 4145.02,812.61 4198.74,866.33 4443.1,866.33 4551.18,974.41 v1(4575.79,974.41)
LED5: D302.2 U301.27 | length 4362.1
  Top Layer w6: U301.27@944.88,422.24 v1(944.88,476.38) ; v1(1188.98,248.03) 1188.98,145.67 v1(1191.93,142.72) ; v1(4575.79,854.33) D302.2@4620.08,854.33
  Bottom Layer w6: v1(944.88,476.38) 956.12,465.14 1086.57,465.14 1177.09,374.62 1177.09,322.91 1188.98,311.02 v1(1188.98,248.03) ; v1(1191.93,142.72) 1233.19,142.72 1330.71,240.24 1330.71,327.79 1419.98,417.06 1489.42,417.06 1497.29,424.94 1867.82,424.94 1954.45,511.57 2259.63,511.57 2259.91,511.28 2328.15,511.28 2414.58,597.71 2568.39,597.71 2745.1,774.42 3590.84,774.42 3642.51,826.09 3742.1,826.09 3767.57,800.61 4149.99,800.61 4203.71,854.33 v1(4575.79,854.33)
NetC108_1: C108.1 R107.1 | length 163.5
  Top Layer w10: C108.1@3330.71,972.44 3330.71,937.01 R107.1@3421.26,846.46
NetC200_1: C200.1 Q200.1 R200.2 R201.1 | length 488.3
  Top Layer w10: R200.2@2866.14,1133.86 R201.1@2921.26,1133.86 v2(2921.26,1074.8) ; C200.1@2877.95,1385.83 2891.73,1372.05 Q200.1@2891.73,1324.8 v2(2938.98,1324.8) v2@2940.94,1322.83
  Bottom Layer w10: v2(2921.26,1074.8) 2921.26,1192.91 2938.98,1210.63 v2(2938.98,1324.8)
NetC202_2: C202.2 Q200.3 Q203.4 R202.1 R204.2 | length 669.1
  Top Layer w10: C202.2@2759.84,1263.78 2773.62,1250 Q200.3@2854.33,1250 2854.33,1192.91 R204.2@2866.14,1181.1 2870.08,1185.04 R202.1@2921.26,1185.04 ; Q203.4@2834.65,921.06 2885.63,921.06 v2(2921.26,956.69)
  Bottom Layer w10: v2(2811.02,1248.03) 2811.02,1066.93 v2(2921.26,956.69)
NetC205_2: C205.2 Q206.1 Q206.2 Q206.3 R209.1 R212.2 | length 74.1
  Top Layer w10: C205.2@3468.5,330.71 3468.5,291.34 3476.38,283.46 R209.1@3500,283.46
NetC213_1: C213.1 R213.2 | length 95.3
  Top Layer w7: C213.1@4055.12,318.9 4055.12,307.09 R213.2@4114.17,248.03
NetC220_1: C220.1 R219.1 | length 54.4
  Top Layer w8: C220.1@3318.9,488.19 3326.77,480.32 R219.1@3326.77,437.01
NetC225_1: C225.1 R224.2 | length 77.9
  Top Layer w8: R224.2@3366.14,535.43 C225.1@3421.26,590.55
NetC300_1: C300.1 C301.2 | length 51.2
  Top Layer w10: C300.1@948.82,1104.33 C301.2@1000,1104.33
NetC302_1: C302.1 C305.2 | length 51.2
  Top Layer w10: C302.1@1657.48,984.25 C305.2@1657.48,1035.43
NetC310_1: C310.1 R309.2 U300.12 U300.13 | length 442.8
  Top Layer w15: C310.1@834.65,1283.46 834.65,1409.45 ; U300.12@895.67,1404.53 839.57,1404.53 834.65,1409.45 ; R309.2@917.32,1551.18 952.76,1515.75 952.76,1444.88 937.99,1430.12 U300.13@895.67,1430.12 855.31,1430.12 834.65,1409.45
NetC320_1: C320.1 U301.10 | length 129.7
  Top Layer w10: U301.10@1102.36,640.75 1102.36,692.91 1124.67,715.22 1124.67,717.36 1136.97,729.66 1139.11,729.66 1153.54,744.09 C320.1@1153.54,748.03
NetC322_1: C322.1 U301.33 | length 111.8
  Top Layer w10: U301.33@1062.99,422.24 1062.99,366.14 C322.1@1102.36,326.77
NetD200_2: D200.2 D201.2 R207.1 | length 147.6
  Top Layer w10: D200.2@2811.02,78.74 D201.2@2885.83,78.74 2909.45,102.36 R207.1@2909.45,141.73
NetD301_1: D301.1 Q301.1 Q301.2 Q301.3 Q302.5 Q302.6 Q302.7 Q302.8 Q303.5 Q303.6 Q303.7 Q303.8 R301.2 | length 161.7
  Top Layer w10: R301.2@1102.36,1165.35 1102.95,1165.94 Q301.3@1181.1,1165.94 ; 1299.21,889.76 1332.68,856.3 D301.1@1332.68,820.87
NetD308_1: D308.1 SW301.3 SW301.4 | length 444.8
  Top Layer w10: SW301.4@4011.81,925.2 4165.35,925.2 ; D308.1@4118.11,716.54 4118.11,732.28 4165.35,779.53 4165.35,925.2 ; SW301.3@4228.35,925.2 4165.35,925.2
NetL200_2: L200.2 L200B.2 R210.2 | length 554.2
  Top Layer w10: L200.2@2590.55,633.86 2622.05,665.35 2622.05,685.04
  Top Layer w50: L200.2@2590.55,633.86 2590.55,653.54 2622.05,685.04 2716.54,779.53 ; 2622.05,665.35 2622.05,633.86 2669.29,681.1 2669.29,688.98 2716.54,736.22 2716.54,779.53 ; R210.2@2792.32,779.53 2716.54,779.53